# Altium PCB transmitter.PcbDoc
Units mm, origin at the board's own origin, x right, y up, seen from the top; angles counter-clockwise.
Board outline 61.37 x 82.03 mm, 2 copper layers (Top Layer, Bottom Layer), stack 1.671 mm thick; 24 components, 20 nets, 95 pads, 9 vias.
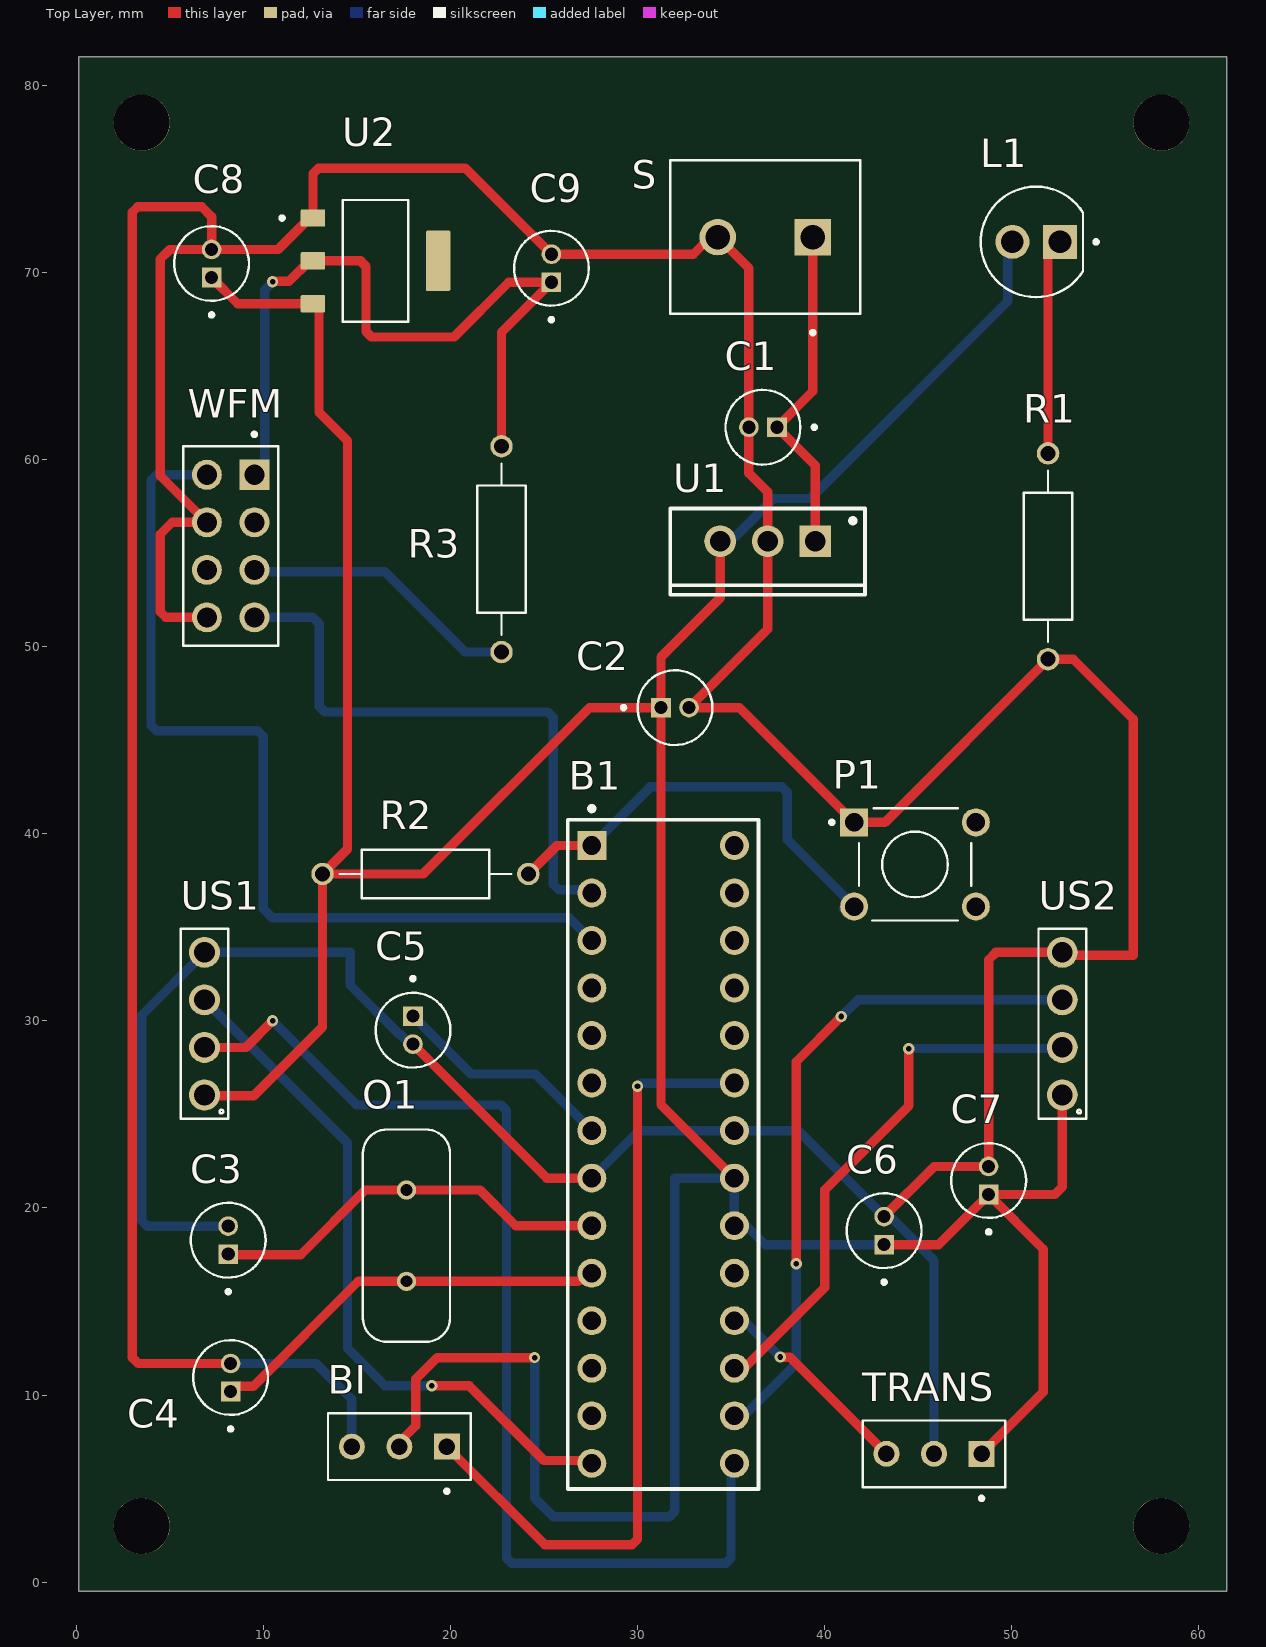
[diagram p0: Top Layer view]
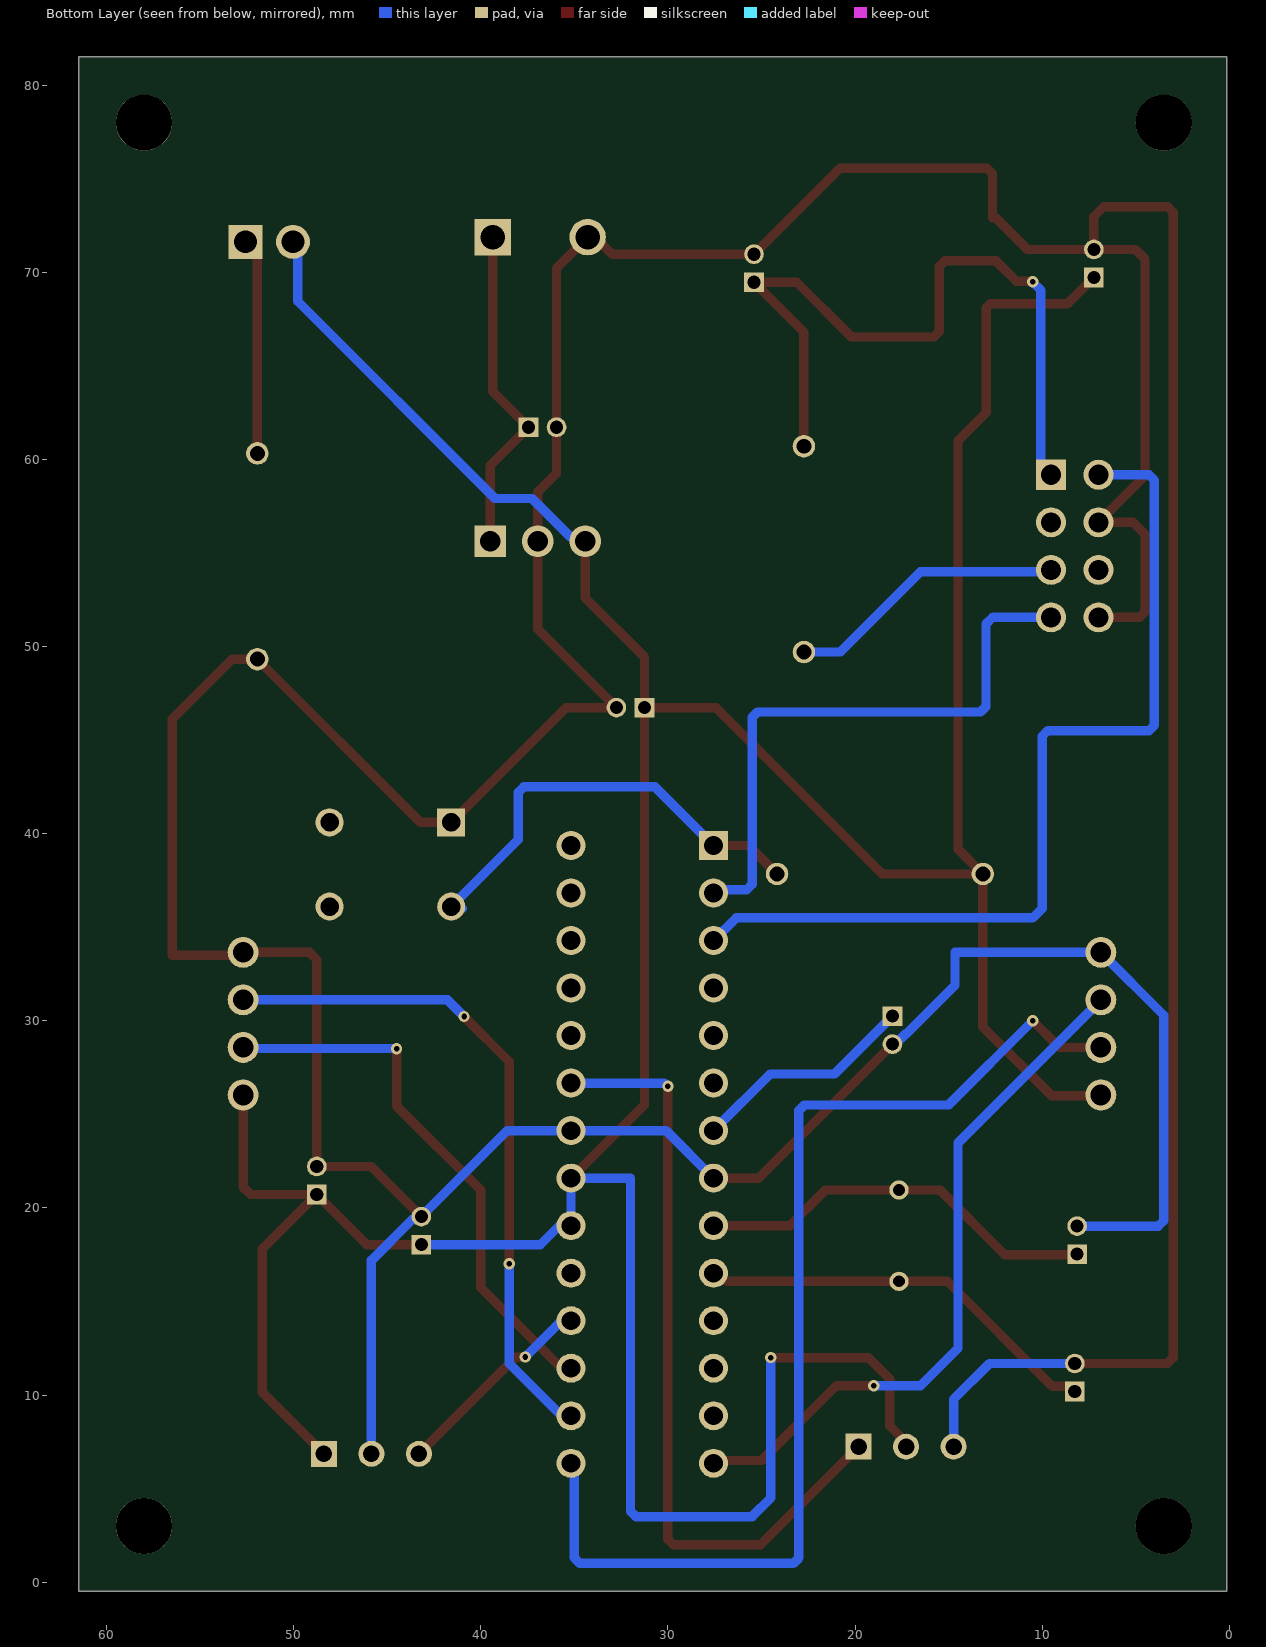
[diagram p1: Bottom Layer view, seen from below]
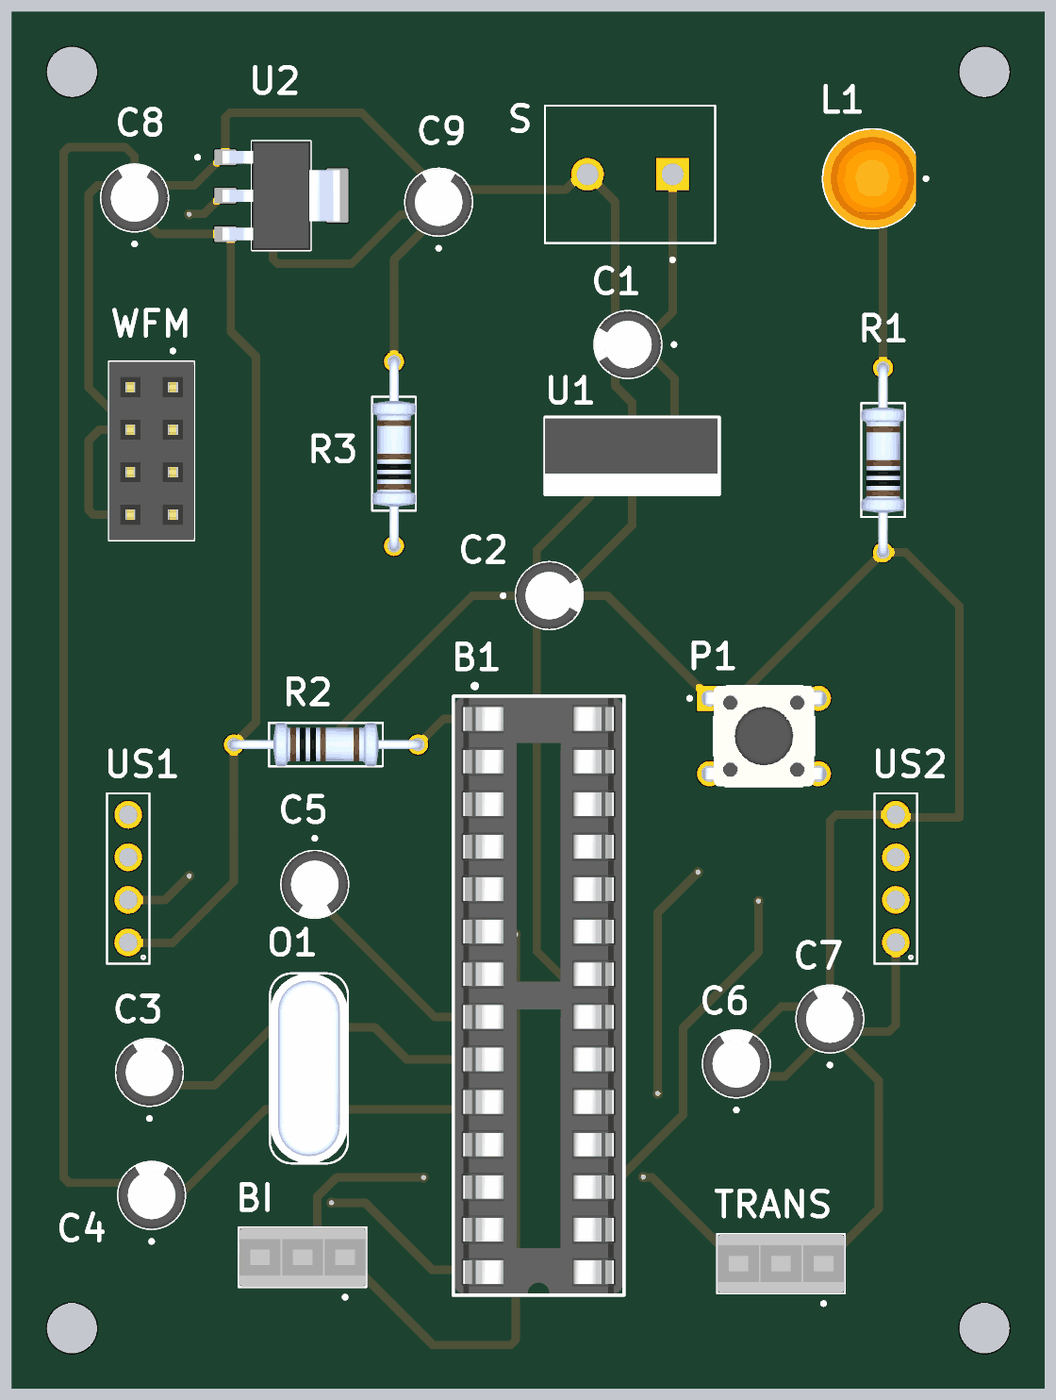
[diagram p2: 3D render of the assembled board from above, using the file's embedded part models]

## Layer stack, top to bottom
Top Solder: solder mask 0.0102, Solder Resist, Dk 3.5
Top Layer: signal copper 0.0356
Dielectric 1: dielectric 1.6, FR-4, Dk 4.8
Bottom Layer: signal copper 0.0356
Bottom Solder: solder mask 0.0102, Solder Resist, Dk 3.5

## Board outline
0.127,-0.5 61.5,-0.5 61.5,81.534 0.127,81.534

## Design rules (kind name [scope] priority, off if disabled: settings)
BoardOutlineClearance [All] p1: gap=0.2 ignorepadtopadclearanceinfootprint=FALSE
Clearance [All] p1: gap=0.203 ignorepadtopadclearanceinfootprint=FALSE except(0.25: Arc-Hole Track-Hole SMDPad-Hole THPad-Hole Via-Hole Fill-Hole Poly-Hole Region-Hole Text-Hole)
ComponentClearance [All] p1: gap=0.127 collisioncheckmode=3 verticalgap=0.127 showdistances=TRUE
DiffPairsRouting [All] p1: maxlimit=0.381 minlimit=0.203 mostfreqgap=0.203 toplayer_minwidth=0.203 toplayer_maxwidth=25.4 toplayer_prefwidth=0.203 bottomlayer_minwidth=0.203 bottomlayer_maxwidth=25.4 bottomlayer_prefwidth=0.203 maxuncoupledlength=12.7
Height [All] p1: minheight=0 maxheight=1816.048 prefheight=12.7
HoleSize [All] p1: absolutevalues=TRUE maxlimit=6.3 minlimit=0.3 maxpercent=80.000 minpercent=20.000
HoleToHoleClearance [All] p1: gap=0.25 allowstackedmicrovias=FALSE
MinimumAnnularRing [All] p1: minimumring=0.076
MinimumSolderMaskSliver [All] p1: minsoldermaskwidth=0
PlaneClearance [All] p1: clearance=0.203
PlaneConnect PlaneConnectPowerPads [InPadClass('PowerPads')] p1: planeconnectstyle=Direct reliefexpansion=0.508 reliefentries=4 reliefconductorwidth=0.254 reliefairgap=0.254
PlaneConnect [All] p2: pad.planeconnectstyle=Relief pad.reliefexpansion=0.3 pad.reliefentries=4 pad.reliefconductorwidth=0.203 pad.reliefairgap=0.203 via.planeconnectstyle=Direct via.reliefexpansion=0.3 via.reliefentries=4 via.reliefconductorwidth=0.127 via.reliefairgap=0.127
PolygonConnect PolygonConnectPowerPads [All vs (InPadClass('PowerPads'))] p1: connectstyle=Direct reliefconductorwidth=0.254 reliefentries=4 polygonreliefangle="90 Angle" airgapwidth=0.254
PolygonConnect [All] p2: thpad.connectstyle=Relief thpad.reliefconductorwidth=0.203 thpad.reliefentries=4 thpad.polygonreliefangle="90 Angle" thpad.airgapwidth=0.203 smdpad.connectstyle=Relief smdpad.reliefconductorwidth=0.203 smdpad.reliefentries=4 smdpad.polygonreliefangle="90 Angle" smdpad.airgapwidth=0.203 via.connectstyle=Direct via.reliefconductorwidth=0.127 via.reliefentries=4 via.polygonreliefangle="90 Angle" via.airgapwidth=0.127
RoutingVias [All] p1: holewidth=0.3 width=0.6 viastyle="Through Hole" minholewidth=0.3 minwidth=0.6 maxholewidth=0.6 maxwidth=6.6
SilkToSilkClearance [All] p1: silktosilkclearance=0
SilkToSolderMaskClearance [IsPad] p1: minsilkscreentomaskgap=0.127 clearancetoexposedcopper=TRUE
SolderMaskExpansion [All] p1: expansion=0.075 istentingtop=FALSE
Width [All] p1: maxlimit=25.4 minlimit=0.203 preferedwidth=0.203 minimp=50.000000 maximp=50.000000 favimp=50.000000
20 further rules are at their usual default settings.

## Components (designator, comment, footprint, x,y, rotation, side; value= is the part's Value field where it differs from the comment)
B1 "1-2199298-8" FP-1-2199298-9-MFG 31.369,22.86 r270 top
BI "5-535541-1" FEMALE 17.272,7.239 r180 top
C1 "EEA-GA1C100" "10UF_CAPACITOR - DUPLICATE" 36.703,61.722 r180 top
C2 "EEA-GA1C100" "10UF_CAPACITOR - DUPLICATE" 32.004,46.736 r0 top
C3 "S220K25SL0N63L6R" "10UF_CAPACITOR - DUPLICATE" 8.128,18.276 r90 top
C4 "S220K25SL0N63L6R" "10UF_CAPACITOR - DUPLICATE" 8.255,10.934 r90 top
C5 "EEA-GA1C100" "10UF_CAPACITOR - DUPLICATE" 18,29.5 r270 top
C6 "EEA-GA1C100" "10UF_CAPACITOR - DUPLICATE" 43.18,18.784 r90 top
C7 "EEA-GA1C100" "10UF_CAPACITOR - DUPLICATE" 48.768,21.463 r90 top
C8 "EEA-GA1C100" "10UF_CAPACITOR - DUPLICATE" 7.239,70.473 r90 top
C9 "EEA-GA1C100" "10UF_CAPACITOR - DUPLICATE" 25.4,70.219 r90 top
L1 "WP7113SRD/J4" LEDRD254W57D500H1070 51.308,71.628 r180 top
O1 "ECS-160-20-4_1" OSCILLATOR 17.653,18.515 r90 top value=16MHz
P1 "COM-00097" P_BUTTON 44.831,38.354 r0 top
R1 "CFM12JT220R" RESISTER 51.943,54.825 r90 top value=220R
R2 "CFM12JT1K00" RESISTER 18.669,37.846 r0 top value=1kR
R3 "CFM12JT1K00" RESISTER 22.733,55.206 r90 top value=1kR
S "TB006-508-02BE" TERMINALBOX 39.37,71.882 r180 top
TRANS "5-535541-1" FEMALE 45.847,6.858 r180 top
U1 "L7805ABV" TO220 36.957,55.626 r180 top
U2 "AMS1117-3.3" SOT229P700X180-4N 16.002,70.612 r0 top
US1 "61300411121" 61300411121 6.858,29.845 r90 top
US2 "61300411121" 61300411121 52.705,29.845 r90 top
WFM "PPPC042LFBN-RC" SULLINS_PPPC042LFBN-RC 8.255,55.372 r90 top

## Footprints (in the part's own frame and the unit in brackets; to place one, negate y for a bottom-side part, rotate by r counter-clockwise, add the part's x,y. Pads: shape width x height; smd on the part's side, far side on the other; paste and mask are expansions set on the pad)
"10UF_CAPACITOR - DUPLICATE" [mm]
  rect 1.05x1.05 hole 0.7: 1(-0.75,0)
  round 1.05 hole 0.7: 2(0.75,0)
  silkscreen extent -2.85,-2 2,2, body extent -2,-2 2,2, height 7
61300411121 [mm]
  round 1.65 hole 1.1: 1(-3.81,0) 2(-1.27,0) 3(1.27,0) 4(3.81,0)
  silkscreen extent -5.08,-1.27 5.08,1.27
FEMALE [mm]
  rect 1.388x1.388 hole 0.88: 1(-2.54,0)
  round 1.388 hole 0.88: 2(0,0) 3(2.54,0)
  silkscreen extent -3.81,-1.78 3.81,2.48, body extent -3.81,-1.78 3.81,1.78, height 6.74
FP-1-2199298-9-MFG [mm]
  rect 1.55x1.55 hole 1 paste-1000 mask+0: 1(-16.51,-3.81)
  round 1.55 hole 1 paste-1000 mask+0: 2(-13.97,-3.81) 3(-11.43,-3.81) 4(-8.89,-3.81) 5(-6.35,-3.81) 6(-3.81,-3.81) 7(-1.27,-3.81) 8(1.27,-3.81) 9(3.81,-3.81) 10(6.35,-3.81) 11(8.89,-3.81) 12(11.43,-3.81) 13(13.97,-3.81) 14(16.51,-3.81) 15(16.51,3.81) 16(13.97,3.81) 17(11.43,3.81) 18(8.89,3.81) 19(6.35,3.81) 20(3.81,3.81) 21(1.27,3.81) 22(-1.27,3.81) 23(-3.81,3.81) 24(-6.35,3.81) 25(-8.89,3.81) 26(-11.43,3.81) 27(-13.97,3.81) 28(-16.51,3.81)
  silkscreen extent -18.6,-5.1 17.88,5.1, body extent -17.98,-5.2 17.98,5.2, height 0.25
LEDRD254W57D500H1070 [mm]
  round 1.815 hole 1.21: 1(1.27,0)
  rect 1.815x1.815 / inner round 1.815 / far side rect 1.815x1.815 hole 1.21: 2(-1.27,0)
  silkscreen extent -3.3,-2.96 2.96,2.96, body extent -2.6,-2.95 2.95,2.95, height 9.1
OSCILLATOR [mm]
  round 1.03 hole 0.63: 1(-2.44,0) 2(2.44,0)
  silkscreen extent -5.68,-2.33 5.68,2.33, body extent -5.68,-2.32 5.68,2.32, height 3.51
P_BUTTON [mm]
  rect 1.498x1.498 / inner round 1.498 / far side rect 1.498x1.498 hole 0.99: 1(-3.25,2.25)
  round 1.498 hole 0.99: 2(-3.25,-2.25) 3(3.25,-2.25) 4(3.25,2.25)
  silkscreen extent -4.54,-3 3,3, body extent -3.9,-3 3.9,3, height 5.01
RESISTER [mm]
  round 1.2 hole 0.8: 1(-5.5,0) 2(5.5,0)
  silkscreen extent -4.58,-1.3 4.58,1.3, body extent -5.77,-1.3 5.77,1.3, height 2.6
SOT229P700X180-4N [mm]
  rrect15% 1.31x0.93 smd: 1(-3.345,2.29) 2(-3.345,0) 3(-3.345,-2.29)
  rrect15% 1.31x3.24 smd: 4(3.345,0)
  silkscreen extent -5.1,-3.25 1.75,3.25, body extent -3.5,-3.25 3.5,3.25, height 1.8
SULLINS_PPPC042LFBN-RC [mm]
  rect 1.605x1.605 hole 1.07: 1(3.81,-1.27)
  round 1.605 hole 1.07: 2(3.81,1.27) 3(1.27,-1.27) 4(1.27,1.27) 5(-1.27,-1.27) 6(-1.27,1.27) 7(-3.81,-1.27) 8(-3.81,1.27)
  silkscreen extent -5.33,-2.54 6.07,2.54, body extent -5.33,-2.54 5.33,2.54, height 8.51
TERMINALBOX [mm]
  rect 1.95x1.95 / inner round 1.95 / far side rect 1.95x1.95 hole 1.3: 1(0,0)
  round 1.95 hole 1.3: 2(5.08,0)
  silkscreen extent -2.54,-4.1 7.62,5.2
TO220 [mm] "TO, Thru-Hole, Vertical, Heatsink Mounted; 3 In-Line Leads; Pitch 2.54 mm"
  rect 1.7x1.7 hole 1.1: 1(-2.54,0)
  round 1.7 hole 1.1: 2(0,0) 3(2.54,0)
  silkscreen extent -5.2,-1.75 5.2,2.85, body extent -5.1,-1.7 5.2,2.87, height 15.89

## Part data
B1: "IC Socket", Manufacturer="TE Connectivity", Manufacturer Series=2199298, Supplier Part Number=571-1-2199298-8, Category="IC and Component Sockets", ComponentLink1Description=https://www.te.com:443/usa-en/product-1-2199298-8.datasheet.pdf?src-supplier=IHS+Markit, ComponentLink1URL=https://www.te.com:443/usa-en/product-1-2199298-8.datasheet.pdf?src-supplier=IHS+Markit, ComponentLink2Description=http://www.alliedelec.com/m/d/1cf61418f54f295ea6d222d573753863.pdf?src-supplier=Allied+Electronics, ComponentLink2URL=http://www.alliedelec.com/m/d/1cf61418f54f295ea6d222d573753863.pdf?src-supplier=Allied+Electronics, ComponentLink3Description=https://www.te.com/commerce/DocumentDelivery/DDEController?Action=srchrtrv&amp;DocNm=2199298&amp;DocType=Customer+Drawing&amp;DocLang=English&src-supplier=Digi-Key, ComponentLink3URL=https://www.te.com/commerce/DocumentDelivery/DDEController?Action=srchrtrv&amp;DocNm=2199298&amp;DocType=Customer+Drawing&amp;DocLang=English&src-supplier=Digi-Key, ComponentLink4Description=http://www.te.com/commerce/DocumentDelivery/DDEController?Action=showdoc&DocId=Customer+Drawing%7F2199298%7FA%7Fpdf%7FEnglish%7FENG_CD_2199298_A_baseFilename.pdf&src-supplier=Avnet, ComponentLink4URL=http://www.te.com/commerce/DocumentDelivery/DDEController?Action=showdoc&DocId=Customer+Drawing%7F2199298%7FA%7Fpdf%7FEnglish%7FENG_CD_2199298_A_baseFilename.pdf&src-supplier=Avnet, Contact Finish - Mating=TIN, Contact Material=Bronze, Device Socket Type="IC SOCKET", Manufacturer Part Number=1-2199298-8, Pricing="1=0.39, 10=0.379, 50=0.379, 100=0.379, 1000=0.379, 10000=0.307 (USD)", Reach SVHC Compliant=Yes, RoHS=Yes, RoHS Compliant=Yes, Stock=5353, Supplier=Mouser
BI TRANS: "Board Connector, 3 Contact(s), 1 Row(s), Female, Straight, 0.1 inch Pitch, Solder Terminal, Locking, Black Insulator, Receptacle", Contact Resistance=12mR, Dielectric Withstanding Voltage (AC)=750V, Insulation Color=Black, Insulation Resistance=5GR, Manufacturer="TE Connectivity", Manufacturer Series=535541, Max Operating Temperature=105°C, Min Operating Temperature=-65°C, Rated Current (Signal)=2A, Supplier Part Number=A32918-ND, Body Breadth=0.14inch, Body Depth=0.265inch, Body Length=0.3inch, Body/Shell Style=RECEPTACLE, Category="Board to Board Connectors", ComponentLink1Description=https://www.te.com:443/usa-en/product-5-535541-1.html?src-supplier=IHS+Markit, ComponentLink1URL=https://www.te.com:443/usa-en/product-5-535541-1.html?src-supplier=IHS+Markit, ComponentLink2Description=https://datasheet.ciiva.com/9479/eng-cs-1307819-section-5-0908-9479741.pdf?src-supplier=Avnet, ComponentLink2URL=https://datasheet.ciiva.com/9479/eng-cs-1307819-section-5-0908-9479741.pdf?src-supplier=Avnet, ComponentLink3Description=https://datasheet.ciiva.com/8047/eng-cs-1307819-section-5-0908-8047511.pdf?src-supplier=Element14, ComponentLink3URL=https://datasheet.ciiva.com/8047/eng-cs-1307819-section-5-0908-8047511.pdf?src-supplier=Element14, ComponentLink4Description=https://datasheet.ciiva.com/746/eng-cd-535541-n6-746289.pdf?src-supplier=Digi-Key, ComponentLink4URL=https://datasheet.ciiva.com/746/eng-cd-535541-n6-746289.pdf?src-supplier=Digi-Key, Connector Type="BOARD CONNECTOR", Contact Finish - Mating="NOT SPECIFIED", Contact Gender=Female, Contact Pattern=RECTANGULAR, Contact Style="SQ PIN-SKT", DIN Conformance=No, Filter Feature=No, IEC Conformance=No, Insulation Material=Glass, Manufacturer Part Number=5-535541-1, Mating Contact Pitch=0.1inch, MIL Conformance=No, Mixed Contacts=No, Mounting Option 1=LOCKING, Mounting Style=STRAIGHT, Mounting Technology=Board, Number Of Connectors=1, Number of Contacts=3, Number Of PCB Rows=1, Number of Rows Loaded=1, Option="General Purpose", PCB Contact Pattern=RECTANGULAR, Plating Thickness=30uin, Pricing="1=1.16, 10=1.084, 100=0.9328, 500=0.82184, 1000=0.73614, 5000=0.66555, 10000=0.62401 (USD)", Reach SVHC Compliant=Yes, Reference Standard=UL, Reliability=COMMERCIAL, RoHS=Yes, RoHS Compliant=Yes, Stock=13190, Supplier=Digi-Key, Terminal Length=0.125inch, Terminal Pitch=2.54mm, Termination=Solder
C1 C2 C5 C6 C7 C8 C9: "Aluminum Electrolytic Capacitor, Polarized, Aluminum (wet), 16V, 20% +Tol, 20% -Tol, 10uF, Through Hole Mount", Capacitance=10uF, Capacitor Type=Aluminium, Leakage Current=3uA, Manufacturer=Panasonic, Manufacturer Series=GA, Max Operating Temperature=105°C, Min Operating Temperature=-55°C, Package Shape=Cylindrical, Package Style=RadialMeter, Rated DC Voltage (URdc)=16V, Ripple Current=30mA, Supplier Part Number=667-EEA-GA1C100, Tolerance  (fill in as +-)=20%, Category="Aluminum Electrolytic Capacitors", ComponentLink1Description=https://datasheet.ciiva.com:443/pdfs/VipMasterIC/IC/PANA/PANA-S-A0007980152/PANA-S-A0007980152-1.pdf?src-supplier=IHS+Markit, ComponentLink1URL=https://datasheet.ciiva.com:443/pdfs/VipMasterIC/IC/PANA/PANA-S-A0007980152/PANA-S-A0007980152-1.pdf?src-supplier=IHS+Markit, ComponentLink2Description=https://datasheet.ciiva.com/11783/0900766b800bd184-11783675.pdf?src-supplier=Rs, ComponentLink2URL=https://datasheet.ciiva.com/11783/0900766b800bd184-11783675.pdf?src-supplier=Rs, ComponentLink3Description=https://datasheet.ciiva.com/30132/61aba0000ce99-30132280.pdf?src-supplier=Onlinecomponents.com, ComponentLink3URL=https://datasheet.ciiva.com/30132/61aba0000ce99-30132280.pdf?src-supplier=Onlinecomponents.com, ComponentLink4Description=https://datasheet.ciiva.com/2984/aba0000ce99-2984970.pdf?src-supplier=Avnet, ComponentLink4URL=https://datasheet.ciiva.com/2984/aba0000ce99-2984970.pdf?src-supplier=Avnet, ComponentLink5Description=https://datasheet.ciiva.com/14606/70256146-14606495.pdf?src-supplier=Allied+Electronics, ComponentLink5URL=https://datasheet.ciiva.com/14606/70256146-14606495.pdf?src-supplier=Allied+Electronics, ComponentLink6Description=https://datasheet.ciiva.com/43461/1521263-43461069.pdf?src-supplier=Farnell, ComponentLink6URL=https://datasheet.ciiva.com/43461/1521263-43461069.pdf?src-supplier=Farnell, ComponentLink7Description=https://datasheet.ciiva.com/24024/aba0000ce99-48764-24024622.pdf?src-supplier=Mouser, ComponentLink7URL=https://datasheet.ciiva.com/24024/aba0000ce99-48764-24024622.pdf?src-supplier=Mouser, Diameter=4mm, Dielectric Material=Aluminium, JESD-609 Code=e3, Length=7mm, Manufacturer Part Number=EEA-GA1C100, Mounting Technology="Through Hole", Packaging=Bulk, Pins=2, Polarity=Polarized, Pricing="1=0.32, 10=0.216, 50=0.144, 100=0.123, 1000=0.086, 10000=0.086 (USD)", Reach SVHC Compliant=Yes, RoHS=Yes, RoHS Compliant=Yes, Series=EEA-GA, Stock=3224, Supplier=Mouser, Tan Delta=0.18, Terminal Finish=Tin, Terminal Pitch=1.5mm, Termination=Wire, Tolerance (fill in as +-)=20%, Voltage=16V
C3 C4: "Ceramic Capacitor, Ceramic, 1000V, 10% +Tol, 10% -Tol, SL0, 120ppm/Cel TC, 0.000022uF, Through Hole Mount", Capacitance=22pF, Capacitor Type=Ceramic, Manufacturer="Vishay BCcomponents", Supplier Part Number=594-S220K25SL0N63L6R, Voltage=16V, Category="Ceramic Capacitors", ComponentLink1Description=https://datasheet.ciiva.com:443/pdfs/VipMasterIC/IC/VISH/VISH-S-A0003941534/VISH-S-A0003941534-1.pdf?src-supplier=IHS+Markit, ComponentLink1URL=https://datasheet.ciiva.com:443/pdfs/VipMasterIC/IC/VISH/VISH-S-A0003941534/VISH-S-A0003941534-1.pdf?src-supplier=IHS+Markit, ComponentLink2Description=https://datasheet.ciiva.com/148/geninfo-cd-rfi-safcaps-148963.pdf?src-supplier=Digi-Key, ComponentLink2URL=https://datasheet.ciiva.com/148/geninfo-cd-rfi-safcaps-148963.pdf?src-supplier=Digi-Key, ComponentLink3Description=https://datasheet.ciiva.com/7974/gapkap-7974888.pdf?src-supplier=Element14, ComponentLink3URL=https://datasheet.ciiva.com/7974/gapkap-7974888.pdf?src-supplier=Element14, Dielectric Material=Ceramic, Manufacturer Part Number=S220K25SL0N63L6R, Pins=2, Pricing="1=0.4, 10=0.197, 50=0.197, 100=0.169, 1000=0.107, 10000=0.095 (USD)", RoHS=Yes, RoHS Compliant=Yes, Stock=23582, Supplier=Mouser
L1: "LED Uni-Color SB. Red 660nm 2-Pin T-1 3/4 Bulk", Manufacturer=Kingbright, Supplier Part Number=754-2139-ND, Category=LEDs, ComponentLink1Description=http://www.kingbrightusa.com/images/catalog/SPEC/WP7113SRD-J4.pdf?src-supplier=Digi-Key, ComponentLink1URL=http://www.kingbrightusa.com/images/catalog/SPEC/WP7113SRD-J4.pdf?src-supplier=Digi-Key, Manufacturer Part Number=WP7113SRD/J4, Pricing="1=0.69, 10=0.448, 100=0.2936, 1000=0.23175, 2000=0.2163, 5000=0.20858, 10000=0.20549, 25000=0.20085 (USD)", RoHS=No, Stock=14375, Supplier=Digi-Key
O1: Package=None, Availability=Unavailable, MP=ECS-160-20-4, Price=None
P1: "CONN HEADER SMD 28POS 0.8MM", Manufacturer=SparkFun, Supplier Part Number=1568-COM-00097-ND, Category="Tactile Switches", Manufacturer Part Number=COM-00097, Pricing="1=0.45 (USD)", RoHS=No, Supplier=Digi-Key
R1: "Fixed Resistor, Carbon Film, 0.5W, 220ohm, 350V, 5% +/-Tol, -400,0ppm/Cel, Through Hole Mount", Manufacturer="Stackpole Electronics", Max Operating Temperature=155°C, Min Operating Temperature=-55°C, Package Diameter=2.3mm, Package Length=6mm, Package Shape=Tubular, Package Style=AxialMeter, Power=500mW, Rated Temperature=70°C, Resistance=220, Resistor Type="FIXED RESISTOR", Supplier Part Number=S220HTR-ND, Temperature Coefficient=400ppm/°C, Tolerance=5%, Working Voltage=350V, Category="Through-Hole Resistors", ComponentLink1Description=https://datasheet.ciiva.com:443/pdfs/VipMasterIC/IC/SEIE/SEIE-S-A0009883960/SEIE-S-A0009883960-1.pdf?src-supplier=IHS+Markit, ComponentLink1URL=https://datasheet.ciiva.com:443/pdfs/VipMasterIC/IC/SEIE/SEIE-S-A0009883960/SEIE-S-A0009883960-1.pdf?src-supplier=IHS+Markit, ComponentLink2Description=https://www.seielect.com/catalog/SEI-CF_CFM.pdf?src-supplier=Avnet, ComponentLink2URL=https://www.seielect.com/catalog/SEI-CF_CFM.pdf?src-supplier=Avnet, ComponentLink3Description=https://www.seielect.com/Catalog/SEI-CF_CFM.pdf?src-supplier=Digi-Key, ComponentLink3URL=https://www.seielect.com/Catalog/SEI-CF_CFM.pdf?src-supplier=Digi-Key, Construction=Tubular, JESD-609 Code=e3, Lead Diameter=0.55mm, Lead Length=28mm, Manufacturer Part Number=CFM12JT220R, Mounting Technology="Through Hole", Packaging="Tape and Reel", Pins=2, Pricing="5000=0.00883, 10000=0.00767, 25000=0.00674, 50000=0.00618, 125000=0.00605 (USD)", Reach SVHC Compliant=Yes, RoHS=Yes, RoHS Compliant=Yes, Stock=15000, Supplier=Digi-Key, Technology="CARBON FILM", Terminal Finish=Tin, Termination=Wire
R2 R3: "Fixed Resistor, Carbon Film, 0.5W, 1000ohm, 350V, 5% +/-Tol, -400,0ppm/Cel, Through Hole Mount", Manufacturer="Stackpole Electronics", Max Operating Temperature=155°C, Min Operating Temperature=-55°C, Package Diameter=2.3mm, Package Length=6mm, Package Shape=Tubular, Package Style=AxialMeter, Power=500mW, Rated Temperature=70°C, Resistance=1K, Resistor Type="FIXED RESISTOR", Supplier Part Number=S1KHCT-ND, Temperature Coefficient=400ppm/°C, Tolerance=5%, Working Voltage=350V, Category="Through-Hole Resistors", ComponentLink1Description=https://datasheet.ciiva.com:443/pdfs/VipMasterIC/IC/SEIE/SEIE-S-A0009883960/SEIE-S-A0009883960-1.pdf?src-supplier=IHS+Markit, ComponentLink1URL=https://datasheet.ciiva.com:443/pdfs/VipMasterIC/IC/SEIE/SEIE-S-A0009883960/SEIE-S-A0009883960-1.pdf?src-supplier=IHS+Markit, ComponentLink2Description=http://components.arrow.com/part/dataview/51859118S46073N1174?src-supplier=Arrow+Electronics, ComponentLink2URL=http://components.arrow.com/part/dataview/51859118S46073N1174?src-supplier=Arrow+Electronics, ComponentLink3Description=https://www.seielect.com/Catalog/SEI-CF_CFM.pdf?src-supplier=Digi-Key, ComponentLink3URL=https://www.seielect.com/Catalog/SEI-CF_CFM.pdf?src-supplier=Digi-Key, ComponentLink4Description=https://www.seielect.com/catalog/SEI-Packaging.pdf?src-supplier=Digi-Key, ComponentLink4URL=https://www.seielect.com/catalog/SEI-Packaging.pdf?src-supplier=Digi-Key, ComponentLink5Description=https://www.seielect.com/catalog/SEI-CF_CFM.pdf?src-supplier=Avnet, ComponentLink5URL=https://www.seielect.com/catalog/SEI-CF_CFM.pdf?src-supplier=Avnet, ComponentLink6Description=https://www.verical.com/server-webapp/html/getDatasheet?partID=470997&src-supplier=Verical, ComponentLink6URL=https://www.verical.com/server-webapp/html/getDatasheet?partID=470997&src-supplier=Verical, Construction=Tubular, JESD-609 Code=e3, Lead Diameter=0.55mm, Lead Length=28mm, Manufacturer Part Number=CFM12JT1K00, Mounting Technology="Through Hole", Packaging="Tape and Reel", Pins=2, Pricing="1=0.1, 10=0.067, 25=0.0488, 50=0.0372, 100=0.0274, 250=0.02092, 500=0.01672, 1000=0.01231 (USD)", Reach SVHC Compliant=Yes, RoHS=Yes, RoHS Compliant=Yes, Stock=145304, Supplier=Digi-Key, Technology="CARBON FILM", Terminal Finish=Tin, Termination=Wire
S: "Barrier Strip Terminal Block", Manufacturer="CUI Devices", Supplier Part Number=490-TB006-508-02BE, Manufacturer Part Number=TB006-508-02BE, Pricing="1=0.86, 10=0.315, 50=0.315, 100=0.301, 1000=0.21, 10000=0.175 (USD)", RoHS=Yes, Stock=47338, Supplier=Mouser
U1: "Linear Voltage Regulator IC 1 Output 1.5A TO-220AB", Package="TO-220 STMicroelectronics", Availability=Unavailable, MF=STMicroelectronics, MP=L7805ABV, Price=None, SnapEDA_Link=https://www.snapeda.com/parts/L7805ABV/STMicroelectronics/view-part/4685/?ref=snap
U2: "Sot223/Pkg 1-Amp 3.3-Volt Low Drop Out Voltage Regulatator", Package="SOT-223 Seeed Technology", Availability="Not in stock", Check_prices=https://www.snapeda.com/parts/AMS1117-3.3/Advanced+Monolithic+Systems/view-part/?ref=eda, MF="Advanced Monolithic Systems", MP=AMS1117-3.3, Price=None, SnapEDA_Link=https://www.snapeda.com/parts/AMS1117-3.3/Advanced+Monolithic+Systems/view-part/?ref=snap
US1 US2: "Board Connector, 4 Contact(s), 1 Row(s), Male, Straight, 0.1 inch Pitch, Solder Terminal, Locking, Black Insulator, Plug", Contact Resistance=20mR, Dielectric Withstanding Voltage (AC)=500V, Insulation Color=Black, Insulation Resistance=1GR, Manufacturer="Wurth Electronics", Max Operating Temperature=125°C, Min Operating Temperature=-40°C, Rated Current (Signal)=3A, Supplier Part Number=732-5317-ND, Body Breadth=0.1inch, Body Depth=0.1inch, Body Length=0.4inch, Body/Shell Style=PLUG, Category="Headers and Wire Housings", ComponentLink1Description=https://datasheet.ciiva.com:443/pdfs/VipMasterIC/IC/MIDC/MIDCS07676/MIDCS07676-1.pdf?src-supplier=IHS+Markit, ComponentLink1URL=https://datasheet.ciiva.com:443/pdfs/VipMasterIC/IC/MIDC/MIDCS07676/MIDCS07676-1.pdf?src-supplier=IHS+Markit, ComponentLink2Description=http://www.farnell.com/cad/1737268.pdf?src-supplier=Element14, ComponentLink2URL=http://www.farnell.com/cad/1737268.pdf?src-supplier=Element14, ComponentLink3Description=https://katalog.we-online.de/em/datasheet/6130xx11121.pdf?src-supplier=Digi-Key, ComponentLink3URL=https://katalog.we-online.de/em/datasheet/6130xx11121.pdf?src-supplier=Digi-Key, Connector Type="BOARD CONNECTOR", Contact Finish - Mating=GOLD, Contact Finish - Termination="Gold (Au) - with Nickel (Ni) barrier", Contact Gender=Male, Contact Material="Copper Alloy", Contact Pattern=RECTANGULAR, Contact Style="SQ PIN-SKT", Insulation Material=Polybutylene, JESD-609 Code=e4, Manufacturer Part Number=61300411121, Mating Contact Pitch=0.1inch, Mounting Option 1=LOCKING, Mounting Style=STRAIGHT, Mounting Technology=Board, Number Of Connectors=1, Number of Contacts=4, Number of Rows Loaded=1, PCB Contact Pattern=RECTANGULAR, Pricing="1=0.19, 10=0.163, 25=0.1352, 50=0.113, 100=0.102, 1000=0.094 (USD)", Reach SVHC Compliant=Yes, Reference Standard=UL, Reliability=COMMERCIAL, RoHS=Yes, RoHS Compliant=Yes, Stock=103058, Supplier=Digi-Key, Terminal Length=0.118inch, Terminal Pitch=2.54mm, Termination=Solder
WFM: "Female, 8 C, Straight, .100\"CC; 3.20mm Tail, No Mounting; PBT, Phos. Bronze, 105 C", Flammability Rating="UL94 V-0", Insulation Color=Black, Manufacturer=Sullins, Max Operating Temperature=105°C, Min Operating Temperature=-40°C, Supplier Part Number=S7107-ND, Voltage Rating=250V, Category=Connectors, ComponentLink1Description=https://media.digikey.com/pdf/Data%20Sheets/Sullins%20PDFs/Female_Headers.100_DS.pdf?src-supplier=Digi-Key, ComponentLink1URL=https://media.digikey.com/pdf/Data%20Sheets/Sullins%20PDFs/Female_Headers.100_DS.pdf?src-supplier=Digi-Key, ComponentLink2Description=http://www.sullinscorp.com/catalogs/101_Page80-81_HEADER_.100_2.54mm_FEMALE.pdf?src-supplier=Future+Electronics, ComponentLink2URL=http://www.sullinscorp.com/catalogs/101_Page80-81_HEADER_.100_2.54mm_FEMALE.pdf?src-supplier=Future+Electronics, Connector Type=Header, Contact Finish - Mating=GOLD, Contact Material=Bronze, Contact Shape=Square, Contact Type="Female Socket", Fastening Type=Pull, Height=8.5mm, Housing Material=Plastic, Insulation Material=Polyester, Lead Free="Lead Free", Length=10.7mm, Manufacturer Part Number=PPPC042LFBN-RC, Mounting Technology="Through Hole", Number of Positions=8, Number of Rows=2, Packaging=Tray, Pitch=2.54mm, Pricing="1=0.69, 10=0.582, 80=0.52275, 440=0.42768, 1000=0.38016, 5000=0.3432 (USD)", RoHS=Yes, RoHS Compliant=Yes, Series=-, Stock=107106, Supplier=Digi-Key, Termination=Solder, Width=5mm

## Free pads (board coordinates)
  round 3 hole 3 unplated: 17(3.5,78) 18(58,78) 19(58,3) 20(3.5,3)

## Via types
v1: diameter 0.6, hole 0.3, Top Layer to Bottom Layer, tented both sides, 9 vias

## Nets (pads, with @x,y where several pads share a name; then routed paths per layer and width w, separated by ;. In a path a pad name is that pad's centre, name@x,y a point inside that pad or via, vN(x,y) a via of type N, cw(c..) or ccw(c..) an arc to the next point about the centre after c; other vN are vias at no path point)
+3.3V: C9.1 R3.2 U2.2 WFM.1 | length 40.9
  Top Layer w0.5: v1(10.5,69.5) 10.519,69.519 11.374,69.519 12.467,70.612 U2.2 15.201,70.612 15.494,70.319 15.494,66.841 15.787,66.548 20.193,66.548 23.114,69.469 C9.1 22.733,66.802 R3.2
  Bottom Layer w0.5: WFM.1 10.078,59.735 10.078,69.05 10.5,69.473 v1(10.5,69.5)
+5V: B1.20 B1.21 BI.2 C2.1 C6.1 C7.1 C8.1 L1.1 R2.1 TRANS.1 U1.3 U2.3 US1.1 US2.1 | length 226.5
  Top Layer w0.5: US1.1 6.893,26 9.5,26 13.169,29.669 R2.1 ; C8.1 8.64,68.322 U2.3 12.766,68.322 12.981,68.107 12.981,62.519 14.5,61 14.5,39.177 R2.1 ; BI.2 17.272,7.479 18.15,8.357 18.15,10.852 19.298,12 v1(24.5,12) ; U1.3 34.417,52.6 31.254,49.437 C2.1 ; B1.21 31.254,25.515 C2.1 ; C6.1 46.089,18.034 C7.1 ; TRANS.1 51.689,10.16 51.689,17.792 C7.1 ; US2.1 52.705,21.121 52.297,20.713 C7.1 ; R2.1 18.542,37.846 27.432,46.736 C2.1
  Bottom Layer w0.5: v1(24.5,12) 24.5,4.5 25.5,3.5 31.707,3.5 32,3.793 32,21.59 B1.21 B1.20 ; U1.3 34.647,55.856 35.207,55.856 37.263,57.912 39.243,57.912 49.786,68.455 49.786,71.376 L1.1 ; B1.20@35.687,19.05 35.812,19.05 36.828,18.034 C6.1
BLVL: B1.23 BI.1 | length 41.9
  Top Layer w0.5: BI.1 25.051,2 29.707,2 30,2.293 v1(30,26.5)
  Bottom Layer w0.5: v1(30,26.5) 30.027,26.5 30.197,26.67 B1.23
ECHO1: B1.14 US1.3 | length 37.4
  Top Layer w0.5: v1(19,10.5) 21,10.5 25,6.5 27.409,6.5 B1.14
  Bottom Layer w0.5: US1.3 14.5,23.473 14.5,12.5 16.5,10.5 v1(19,10.5)
ECHO2: B1.16 US2.3 | length 35.7
  Top Layer w0.5: v1(38.481,17.018) 38.481,27.813 v1(40.894,30.226)
  Bottom Layer w0.5: B1.16@35.687,8.89 38.481,11.684 v1(38.481,17.018) ; v1(40.894,30.226) 41.783,31.115 US2.3
GND: B1.8 B1.22 BI.3 C1.2 C2.2 C3.2 C4.2 C5.2 C6.2 C7.2 C8.2 C9.2 P1.1 R1.1 S.2 TRANS.2 U1.2 U2.1 US1.4 US2.4 WFM.4 WFM.8 | length 319.6
  Top Layer w0.5: WFM.8 4.793,51.562 4.5,51.855 4.5,56 5.142,56.642 WFM.4 4.5,59.127 4.5,70.707 5.016,71.223 C8.2 ; C4.2 3.316,11.684 3,12 3,73.207 3.293,73.5 6.707,73.5 7.239,72.968 C8.2 ; C5.2 25.16,21.59 B1.8 ; C6.2 45.859,22.213 C7.2 48.768,33.268 49.155,33.655 US2.4 52.86,33.5 56.5,33.5 56.5,46.116 53.293,49.323 51.945,49.323 R1.1 43.222,40.604 P1.1 35.449,46.736 C2.2 36.957,50.939 U1.2 36.957,58.26 35.953,59.264 C1.2 35.953,70.219 S.2 33.898,71.882 32.985,70.969 C9.2 20.804,75.565 12.95,75.565 12.657,75.272 U2.1 12.467,72.902 10.788,71.223 C8.2
  Bottom Layer w0.5: C3.2 3.793,19.026 3.5,19.319 3.5,30.297 US1.4 14.655,33.655 14.655,31.904 17.287,29.272 17.329,29.272 17.851,28.75 C5.2 ; C4.2 12.816,11.684 14.732,9.768 BI.3 ; B1.8 30.099,24.13 B1.22 ; B1.22@35.687,24.13 38.584,24.13 C6.2 43.285,19.429 43.613,19.429 45.847,17.195 TRANS.2
NetB1_1: B1.1 P1.2 R2.2 | length 24.1
  Top Layer w0.5: R2.2 25.693,39.37 B1.1
  Bottom Layer w0.5: B1.1 30.689,42.5 37.707,42.5 38,42.207 38,39.685 P1.2 41.477,36 P1.2@41,36
NetB1_9: B1.9 C3.1 O1.2 | length 21.7
  Top Layer w0.5: C3.1 8.154,17.5 12,17.5 15.455,20.955 O1.2 21.583,20.955 23.488,19.05 B1.9
NetB1_10: B1.10 C4.1 O1.1 | length 21.9
  Top Layer w0.5: C4.1 8.53,10.459 9.459,10.459 15.075,16.075 O1.1 26.84,16.075 27.275,16.51 B1.10
NetC1_1: C1.1 S.1 U1.1 | length 17.9
  Top Layer w0.5: S.1 39.37,63.639 C1.1 39.497,59.678 U1.1
NetL1_2: L1.2 R1.2 | length 11.6
  Top Layer w0.5: R1.2 51.943,70.993 L1.2
NetR3_1: R3.1 WFM.5 | length 15
  Bottom Layer w0.5: WFM.5 9.627,54 16.5,54 20.794,49.706 R3.1
NetWFM_3: WFM.3
NetWFM_6: WFM.6
RX: B1.2 WFM.7 | length 31.9
  Bottom Layer w0.5: WFM.7 12.645,51.562 13,51.207 13,46.793 13.293,46.5 25.207,46.5 25.5,46.207 25.5,37.293 25.793,37 27.389,37 B1.2
TRIG1: B1.15 US1.2 | length 60
  Top Layer w0.5: US1.2 9.075,28.575 v1(10.5,30)
  Bottom Layer w0.5: v1(10.5,30) 15,25.5 22.707,25.5 23,25.207 23,1.293 23.293,1 34.707,1 35,1.293 35,6.171 B1.15
TRIG2: B1.17 US2.2 | length 29
  Top Layer w0.5: B1.17@35.687,11.43 40.005,15.748 40.005,20.955 44.5,25.45 v1(44.5,28.5)
  Bottom Layer w0.5: v1(44.5,28.5) 44.519,28.519 52.649,28.519 US2.2
TRNS: B1.18 TRANS.3 | length 10.6
  Top Layer w0.5: v1(37.626,12.031) 37.645,12.012 38.153,12.012 TRANS.3
  Bottom Layer w0.5: B1.18@35.687,13.97 v1(37.626,12.031)
TX: B1.3 WFM.2 | length 49.9
  Bottom Layer w0.5: WFM.2 4.293,59.182 4,58.889 4,45.793 4.293,45.5 9.707,45.5 10,45.207 10,36 10.5,35.5 26.349,35.5 B1.3
VCC: B1.7 C5.1 | length 12.1
  Bottom Layer w0.5: C5.1 21.097,27.153 24.536,27.153 B1.7
pads on no net: B1.4 B1.5 B1.6 B1.11 B1.12 B1.13 B1.19 B1.24 B1.25 B1.26 B1.27 B1.28 P1.3 P1.4 U2.4

## Silkscreen, mask and mechanical layers (free items; w line width, h text height)
Outline:
  lines w0.2: 0,-0.5 0,81.5 61.5,81.5 61.5,-0.5 0,-0.5